# Altium PCB Sensors_and_MCU.PcbDoc
Units mil, origin at the board's own origin, x right, y up, seen from the top; angles counter-clockwise.
Board outline 2913.39 x 2795.28 mil, 2 copper layers (Top Layer, Bottom Layer); 42 components, 33 nets, 173 pads, 21 vias.
Unrouted connection lines stored in the file: 2.
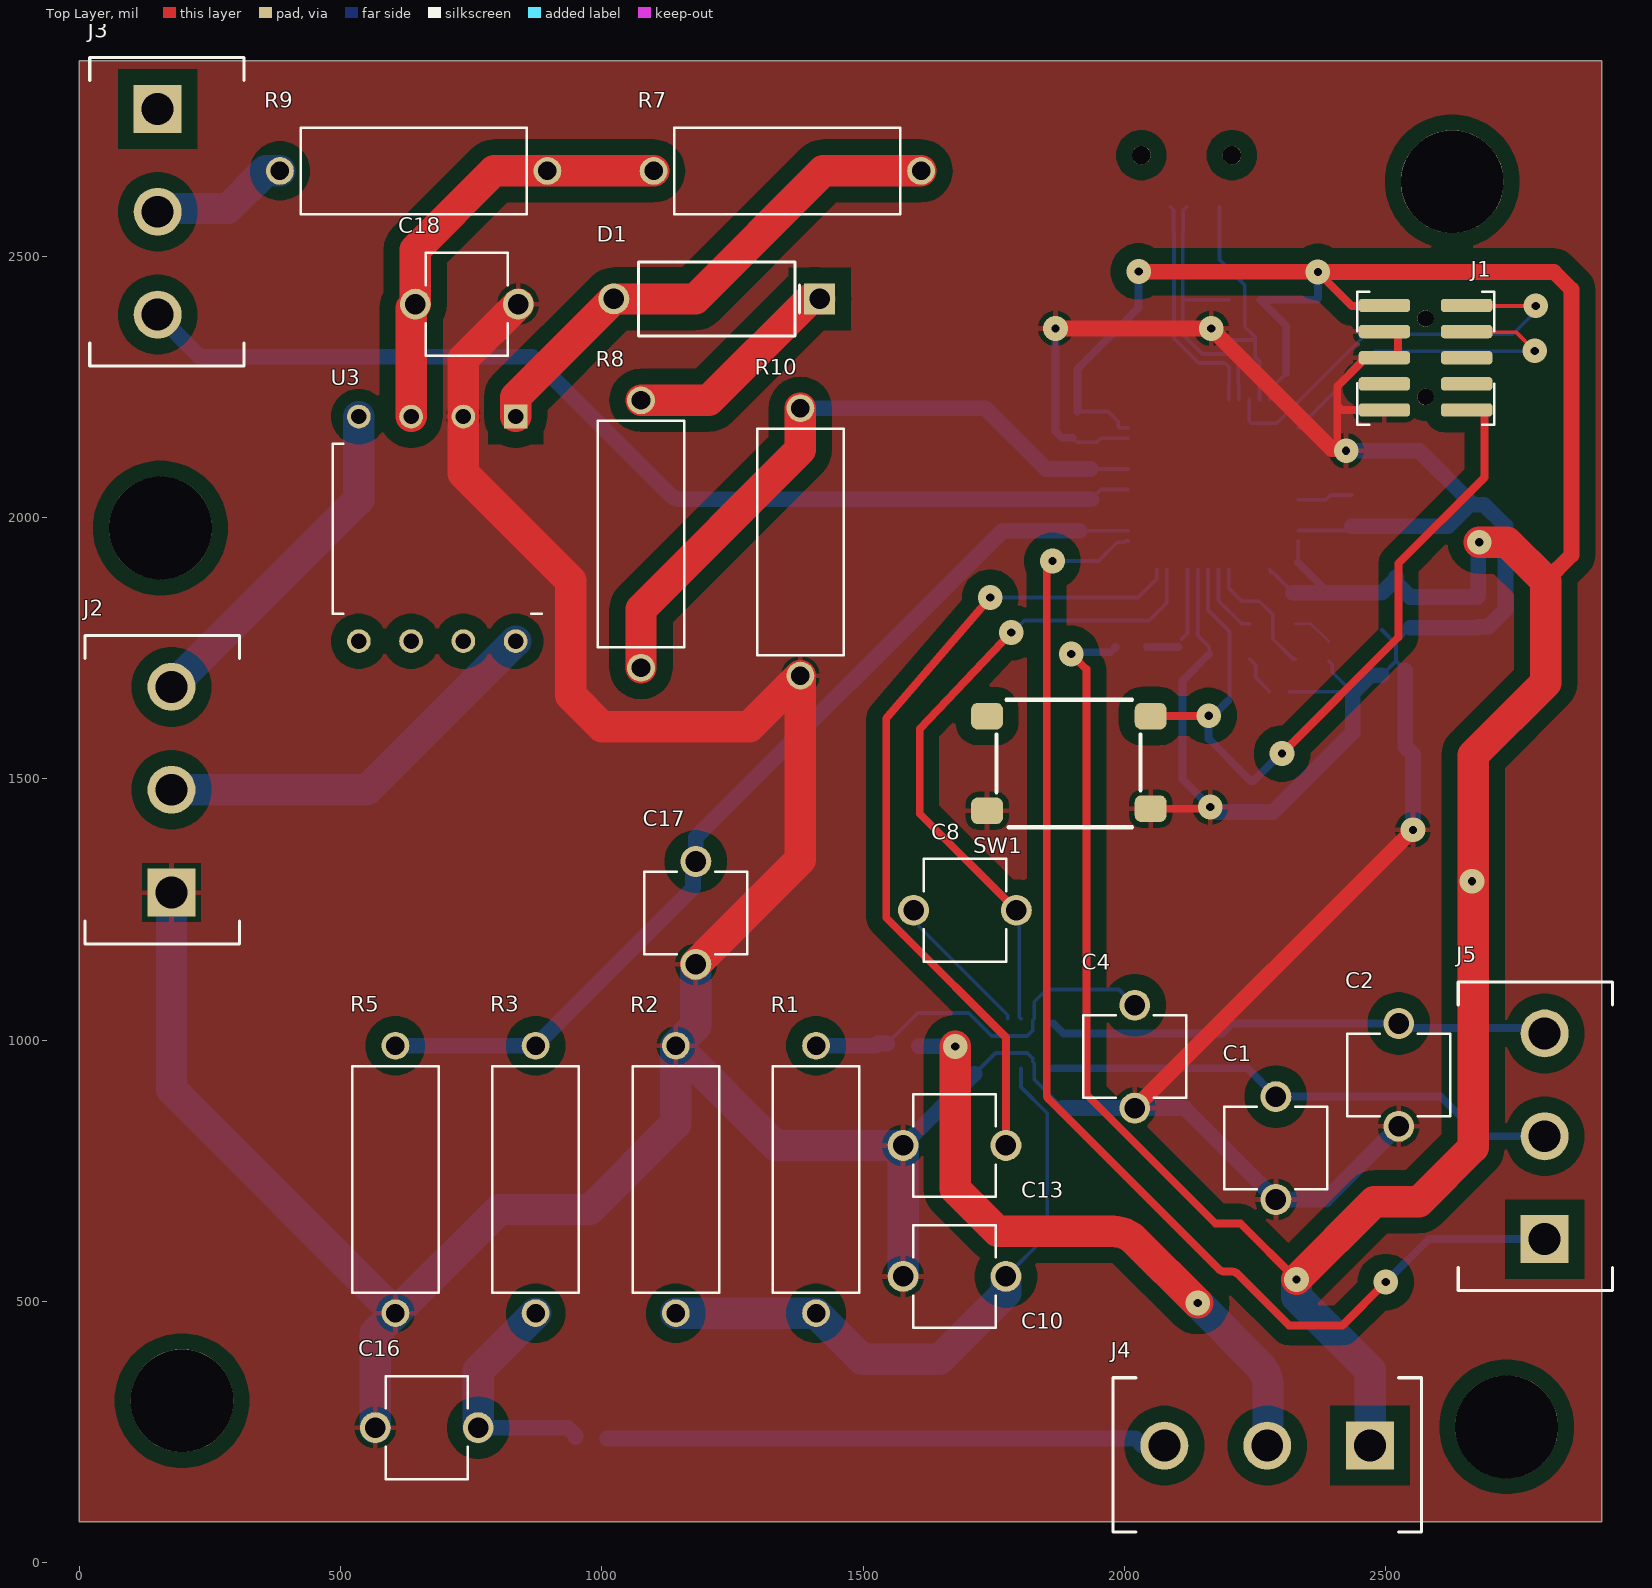
[diagram p0: Top Layer view]
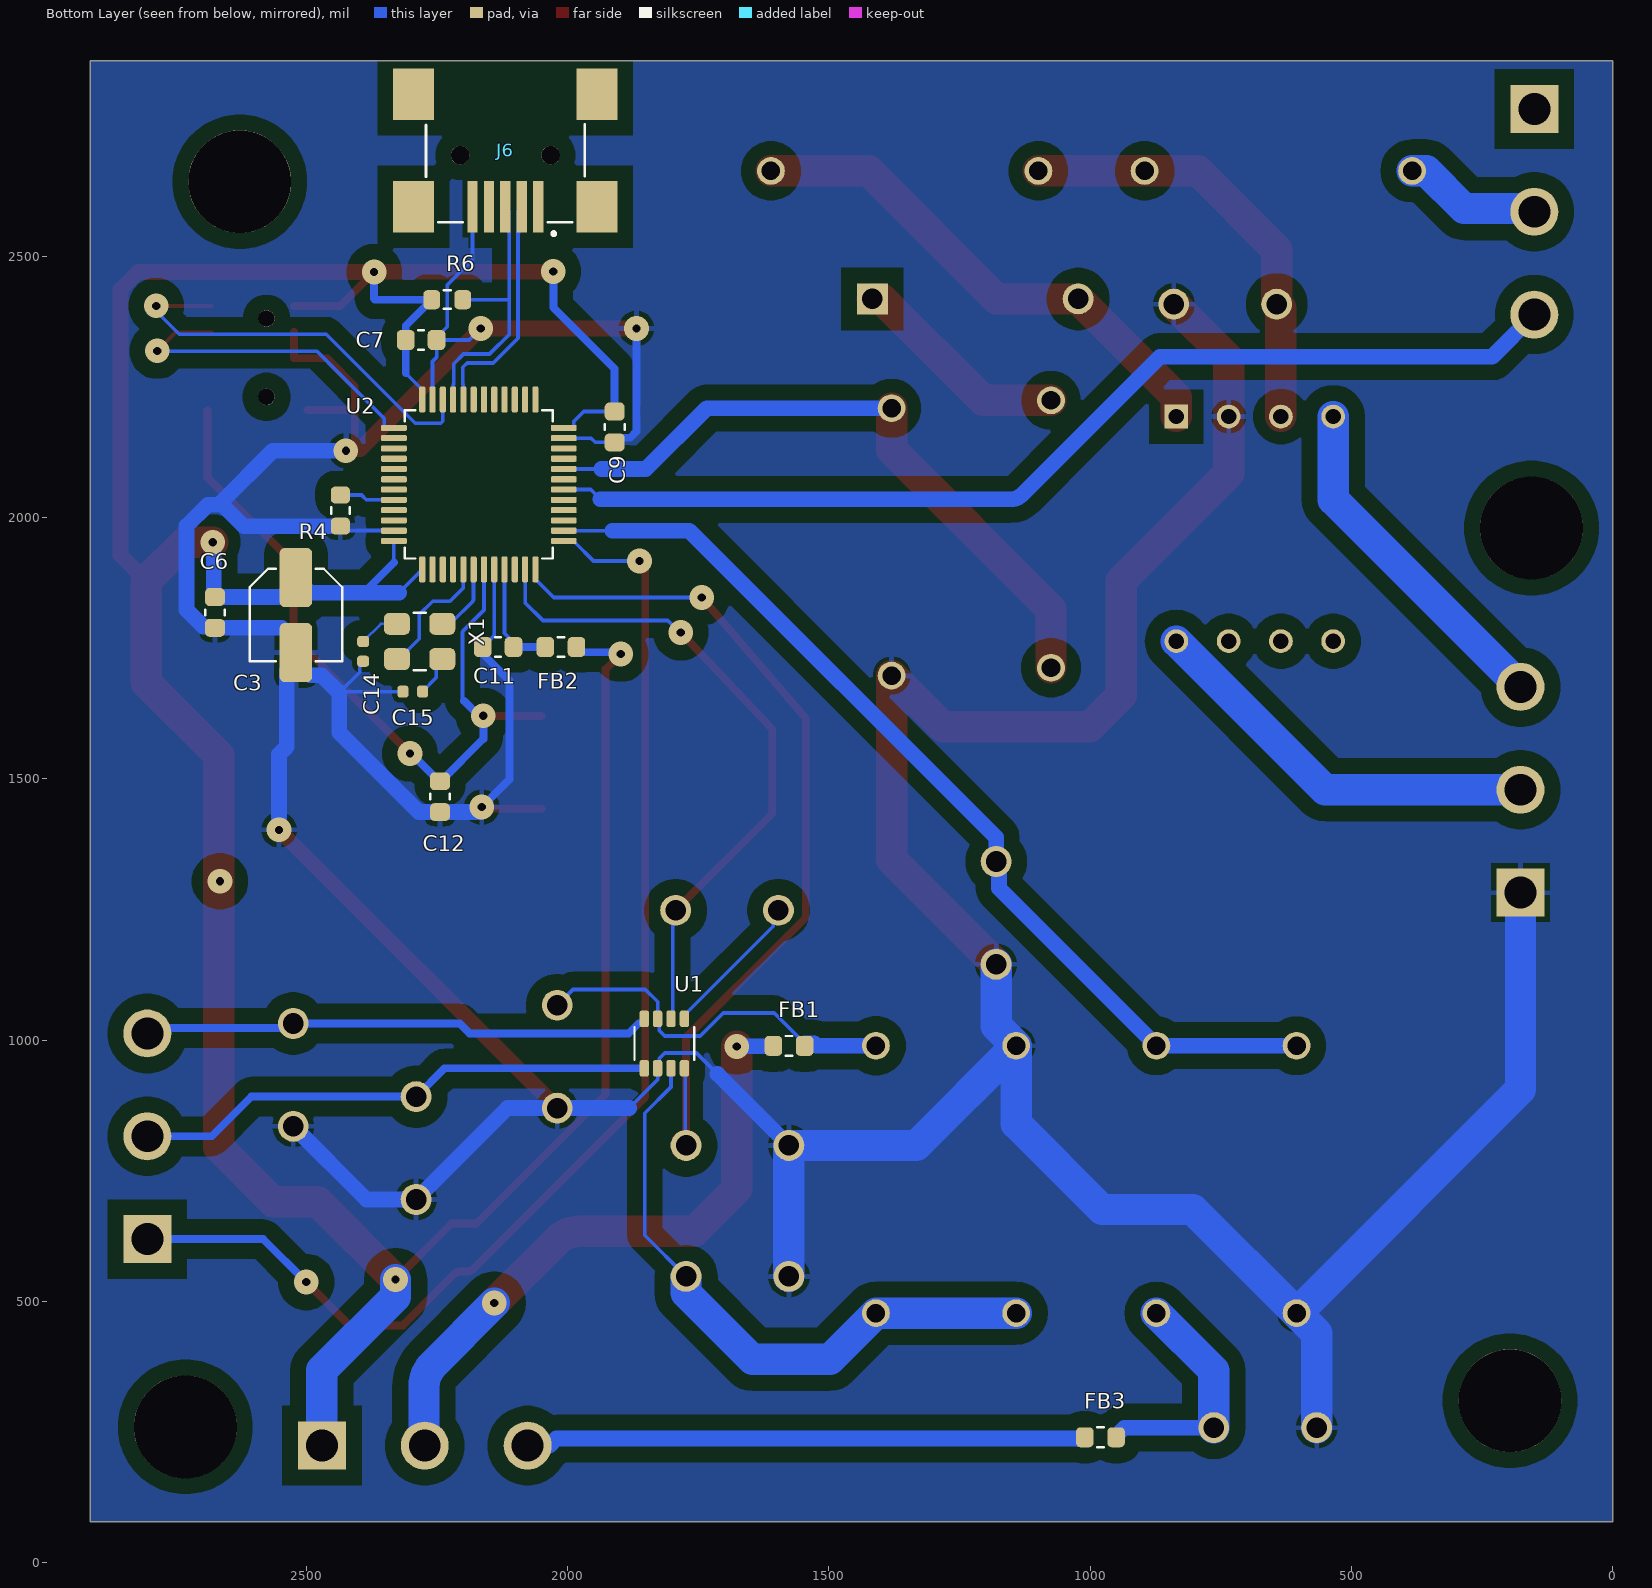
[diagram p1: Bottom Layer view, seen from below]
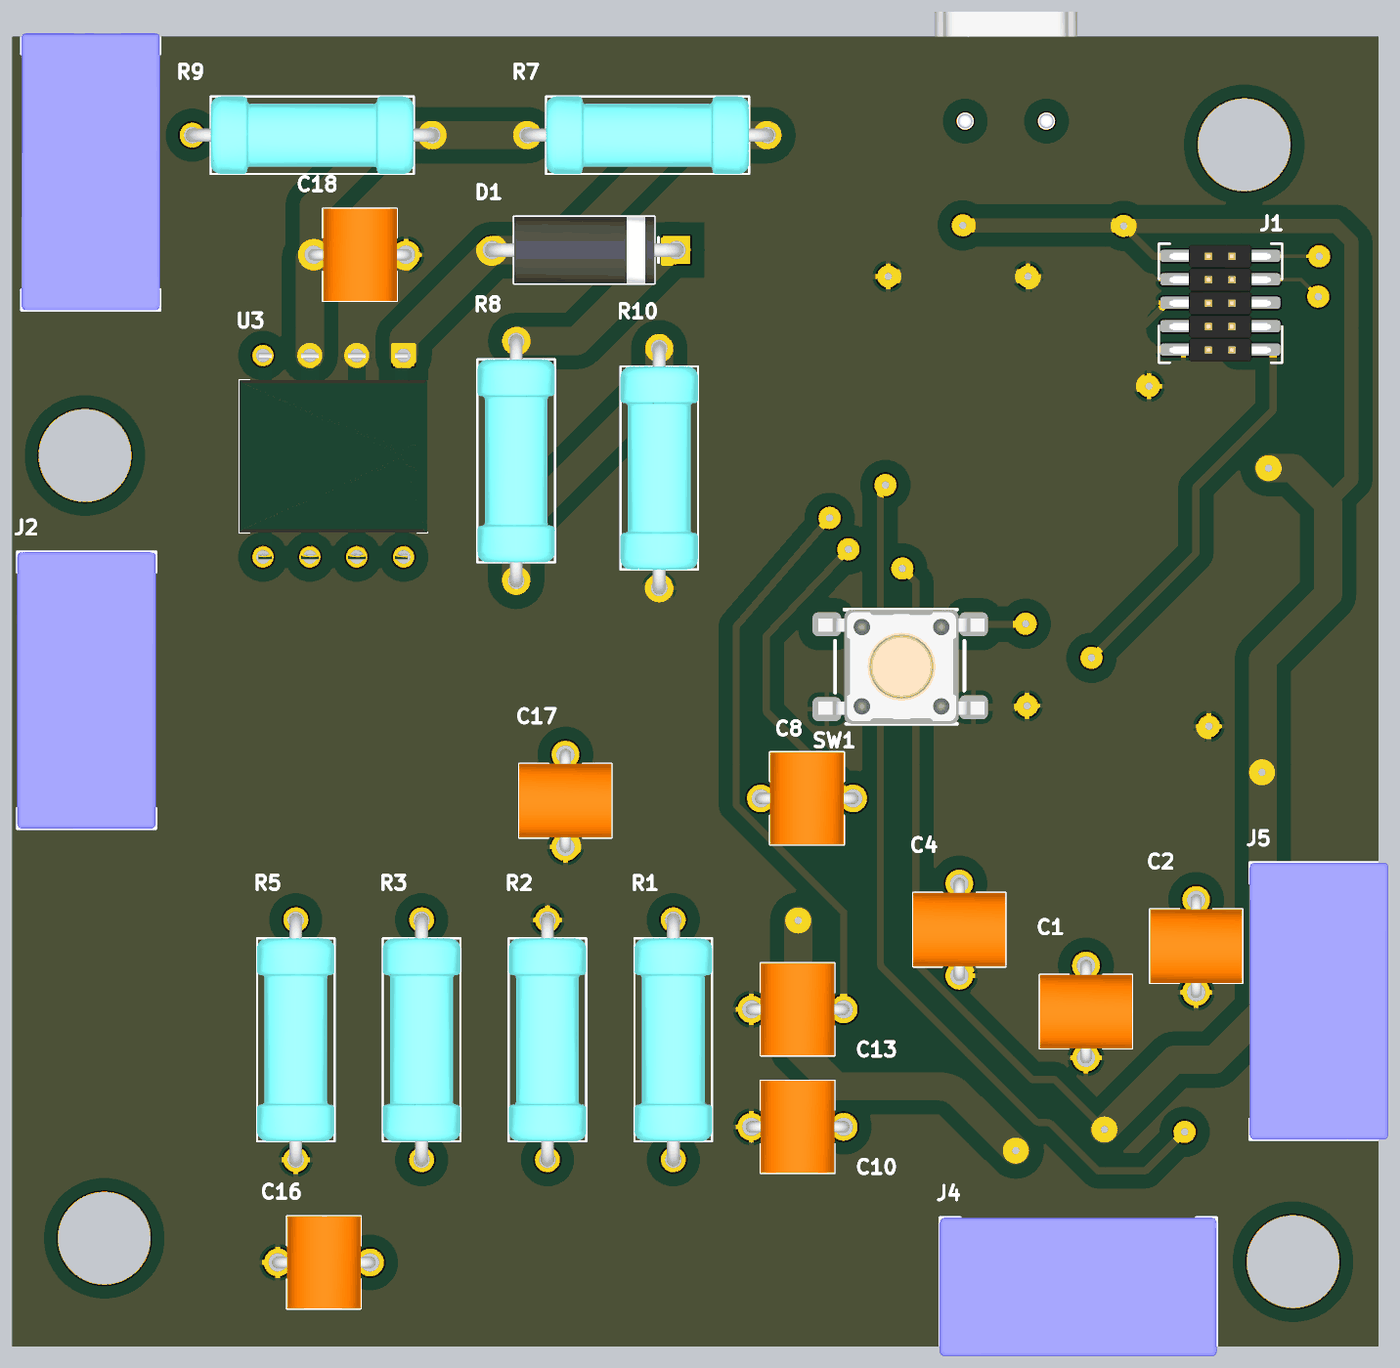
[diagram p2: 3D render of the assembled board from above, using the file's embedded part models]
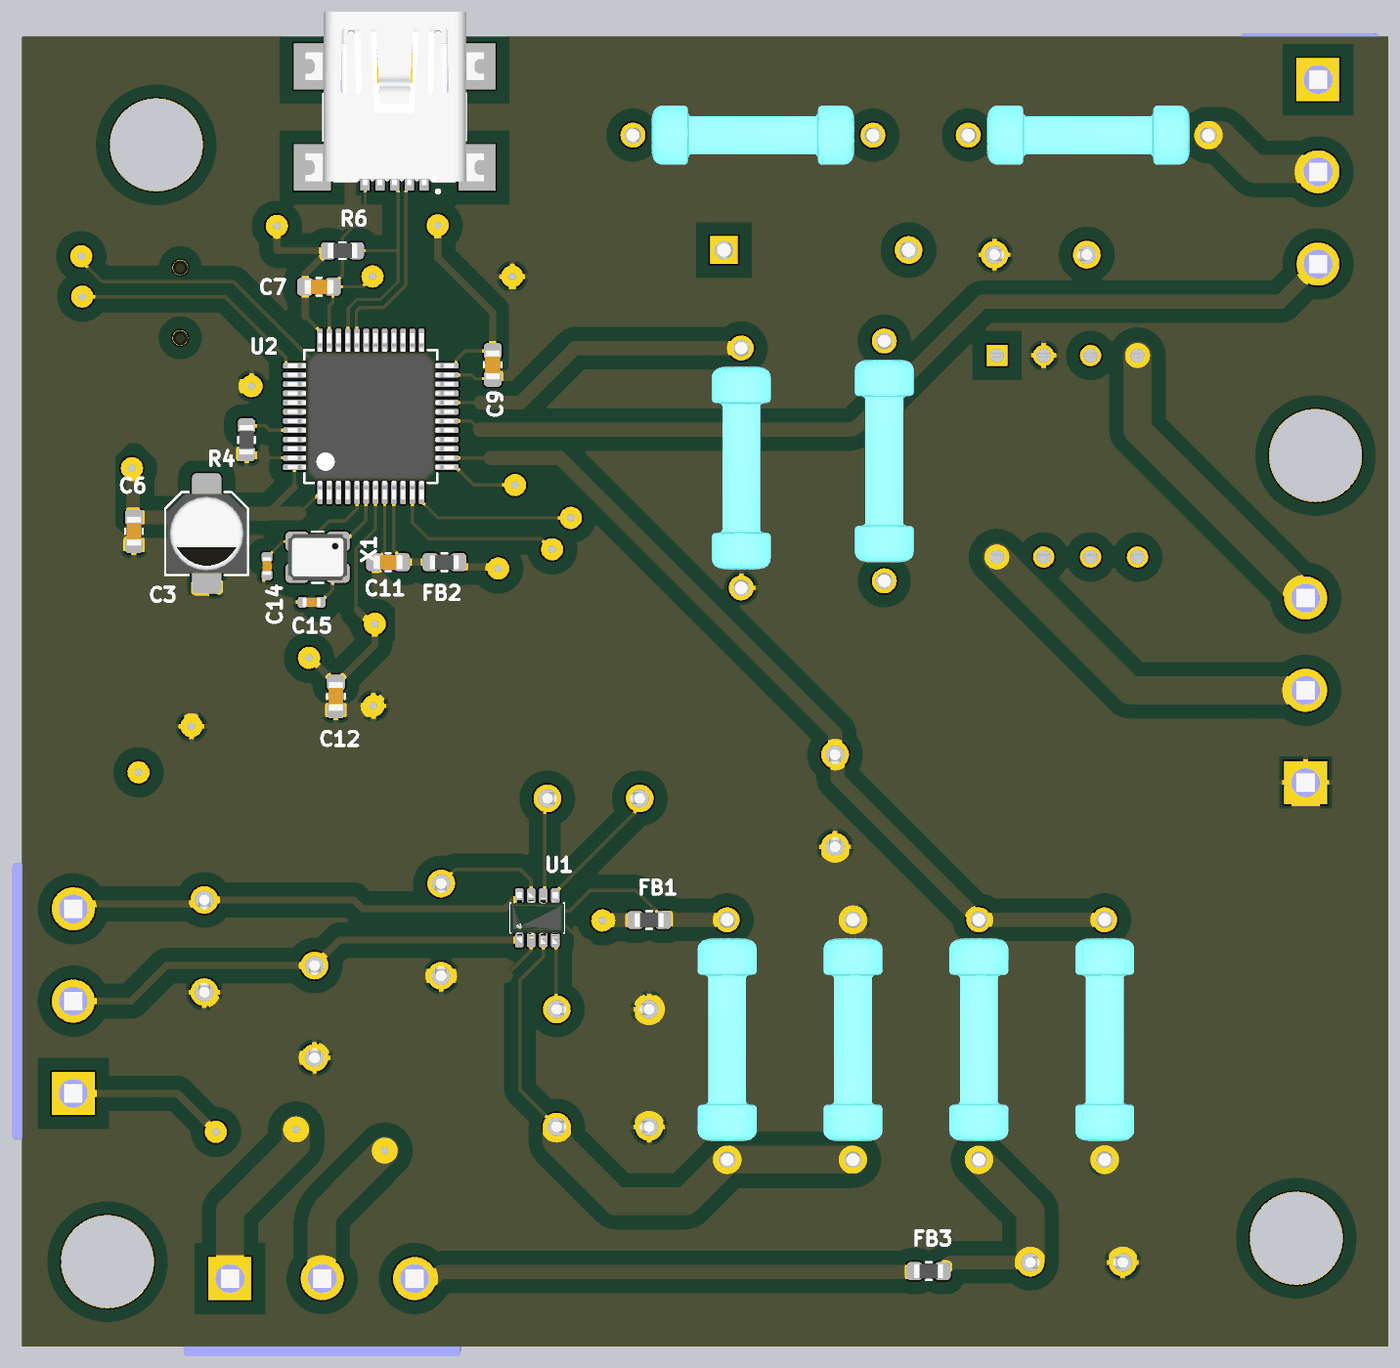
[diagram p3: 3D render of the assembled board from below, using the file's embedded part models]

## Layer stack, top to bottom
Top Solder: solder mask 0.4, Solder Resist, Dk 3.5
Top Layer: signal copper 1.4
Dielectric 1: dielectric 12.6, FR-4, Dk 4.8
Bottom Layer: signal copper 1.4
Bottom Solder: solder mask 0.4, Solder Resist, Dk 3.5

## Board outline
0,78.74 0,2874.02 2913.39,2874.02 2913.39,78.74

## Design rules (kind name [scope] priority, off if disabled: settings)
Clearance [All] p1: gap=30 ignorepadtopadclearanceinfootprint=FALSE except(0: Arc-Hole Track-Hole SMDPad-Hole THPad-Hole Via-Hole Text-Hole; 6: SMDPad-SMDPad; 10: Arc-Arc Arc-Track Arc-SMDPad Arc-THPad Arc-Via Arc-Text Track-Track Track-SMDPad Track-THPad Track-Via Track-Text SMDPad-THPad SMDPad-Via SMDPad-Text THPad-THPad THPad-Via THPad-Text Via-Via Via-Text Text-Text)
DiffPairsRouting [All] p1: maxlimit=10 minlimit=7 mostfreqgap=10 toplayer_minwidth=5 toplayer_maxwidth=15 toplayer_prefwidth=15 bottomlayer_minwidth=5 bottomlayer_maxwidth=15 bottomlayer_prefwidth=15 maxuncoupledlength=500
MinimumSolderMaskSliver [All] p1 off: minsoldermaskwidth=10
PolygonConnect [All] p1: connectstyle=Relief reliefconductorwidth=10 reliefentries=4 polygonreliefangle="90 Angle" airgapwidth=10
RoutingVias [All] p1: holewidth=15.75 width=47.24 viastyle="Through Hole" minholewidth=15.75 minwidth=47.24 maxholewidth=196.85 maxwidth=196.85
SilkToSilkClearance [All] p1 off: silktosilkclearance=10
SilkToSolderMaskClearance [IsPad] p1 off: minsilkscreentomaskgap=10 clearancetoexposedcopper=TRUE
SolderMaskExpansion [All] p1: expansion=4 istentingtop=FALSE
Width [All] p1: maxlimit=80 minlimit=5 preferedwidth=30
26 further rules are at their usual default settings.

## Classes and differential pairs
differential pair USB_Data: +USB_D_P -USB_D_N
differential pair Force: +Force_P -Force_N

## Components (designator, comment, footprint, x,y, rotation, side; value= is the part's Value field where it differs from the comment)
C1 "Capacitor-NP" C-NP 2289.65,793.46 r90 top value=5nF
C2 "Capacitor-NP" C-NP 2524.65,933.46 r90 top value=5nF
C3 "10uF" CAPAE430X610D540L170X65N 2519.65,1813.46 r270 bottom
C4 "Capacitor-NP" C-NP 2019.65,968.46 r90 top value=100nF
C6 "100nF" CAPC160X80X87L35N 2674.65,1818.46 r90 bottom
C7 "100nF" CAPC160X80X87L35N 2280,2340 r0 bottom
C8 "Capacitor-NP" C-NP 1694.65,1248.46 r0 top value=680pF
C9 "100nF" CAPC160X80X87L35N 1909.65,2173.46 r90 bottom
C10 "Capacitor-NP" C-NP 1674.65,547.77 r0 top value=5nF
C11 "100nF" CAPC160X80X87L35N 2132.65,1752.46 r180 bottom
C12 "100nF" CAPC160X80X87L35N 2244,1466 r270 bottom
C13 "Capacitor-NP" C-NP 1674.65,798.46 r0 top value=39nF
C14 "4pF" CAPC100X50X55L22N 2391,1744 r90 bottom
C15 "4pF" CAPC100X50X55L22N 2296,1667 r180 bottom
C16 "Capacitor-NP" C-NP 664.65,258.46 r0 top value=100nF
C17 "Capacitor-NP" C-NP 1179.65,1243.46 r90 top value=100nF
C18 "Capacitor-NP" C-NP 741.22,2408.46 r180 top value=5nF
D1 "Diode" Diode 1219.65,2418.46 r180 top
FB1 "BLM18HE152SH1D" BEADC160X80X95L30N 1576,989 r0 bottom
FB2 "BLM18HE152SH1D" BEADC160X80X95L30N 2012.65,1752.46 r0 bottom
FB3 "BLM18HE152SH1D" BEADC160X80X95L30N 980,240 r180 bottom
J1 "Header_10P" M50-3610542 2576,2306 r270 top
J2 "Molex Micro-Latch" ScrewTerminal 158.46,1479.15 r90 top
J3 "Molex Micro-Latch" ScrewTerminal 167.36,2585.32 r270 top
J4 "Molex Micro-Latch" ScrewTerminal 2273.15,206.28 r180 top
J5 "Molex Micro-Latch" ScrewTerminal 2786.28,816 r90 top
J6 "USB" USB_mini 2053.46,2600.94 r0 bottom
R1 "100k" R-2W 1409.65,733.46 r90 top
R2 "47k" R-2W 1141.31,733.46 r270 top
R3 "200k" R-2W 872.98,733.46 r270 top
R4 "1.5k" RESC160X80X50L30N 2434.65,2013.46 r90 bottom
R5 "100k" R-2W 604.65,733.46 r90 top
R6 "1.5k" RESC160X80X50L30N 2230,2417 r0 bottom
R7 "120k" R-2W 1354.65,2663.46 r180 top
R8 "1M" R-2W 1074.65,1968.46 r90 top
R9 "1k" R-2W 639.65,2663.46 r180 top
R10 "270k" R-2W 1379.65,1953.46 r90 top
SW1 "DTSM-62N-V-T/R" DTSM62 2050,1442.83 r180 top
U1 "AD8293G160ARJZ" SOT23-8P65_280X145L45X30N 1814.65,993.46 r180 bottom
U2 "STM32F103CB" QFP48P50_900X900X160L60X22N 2169.65,2063.46 r180 bottom
U3 "RC4558P" DIP1092W45P254L959H508Q8 684.65,1978.46 r180 top
X1 "16 MHz" OSCCC320X250X60L90X110N 2283,1763 r0 bottom

## Footprints (in the part's own frame and the unit in brackets; to place one, negate y for a bottom-side part, rotate by r counter-clockwise, add the part's x,y. Pads: shape width x height; smd on the part's side, far side on the other; paste and mask are expansions set on the pad)
BEADC160X80X95L30N [mm] "Ferrite Bead, Chip; 1.60 mm L X 0.80 mm W X 0.95 mm H body"
  rrect49% 0.85x0.97 smd: 1(-0.76,0) 2(0.76,0)
  silkscreen extent -0.16,-0.48 0.16,0.48, body extent -1.4,-0.7 1.4,0.7, height 1.04
C-NP [mm] "Capacitor, Radial (Disk), 5.00 mm Pitch X 0.80 mm W X 4.00 mm L X 5.00 mm T X 6.00 mm H body"
  round 1.5 hole 1 paste-1.5: 1(-2.5,0) 2(2.5,0)
  silkscreen extent -2,-2.5 2,2.5, body extent -2.8,-2.5 2.8,2.5, height 6
CAPAE430X610D540L170X65N [mm] "Capacitor, Aluminum Electrolytic; 4.30 mm L X 4.30 mm W X 6.10 mm H body"
  rrect32% 2.88x1.58 smd: 1(-1.825,0) 2(1.825,0)
  silkscreen extent -2.25,-2.25 2.25,2.25, body extent -3.47,-2.45 3.47,2.45, height 6.1
CAPC100X50X55L22N [mm] "Capacitor, Chip; 1.00 mm L X 0.50 mm W X 0.55 mm H body"
  rrect52% 0.54x0.58 smd: 1(-0.48,0) 2(0.48,0)
  body extent -0.9,-0.44 0.9,0.44, height 1.04
CAPC160X80X87L35N [mm] "Capacitor, Chip; 1.60 mm L X 0.80 mm W X 0.87 mm H body"
  rrect51% 0.87x0.97 smd: 1(-0.75,0) 2(0.75,0)
  silkscreen extent -0.14,-0.48 0.14,0.48, body extent -1.39,-0.69 1.39,0.69, height 0.87
Diode [mm] "Diode, Axial; 10.00 mm Pitch X 0.75 mm W 7.60 mm L X 5.00 mm Dia. body"
  round 1.5 hole 1 paste-1.5: A(5,0)
  rect 1.5x1.5 / inner round 1.5 / far side rect 1.5x1.5 hole 1 paste-1.5: C(-5,0)
  silkscreen extent -4.03,-1.8 3.8,1.8, body extent -5.38,-1.81 5.38,1.81, height 5.01
DIP1092W45P254L959H508Q8 [mm] "DIP, 10.92 mm lead span, 2.54 mm pitch; 8 pin, 9.59 mm L X 7.94 mm W X 5.08 mm H body"
  rect 1.15x1.15 / inner round 1.15 / far side rect 1.15x1.15 hole 0.75 paste-1.15: 1(-3.81,-5.46)
  round 1.15 hole 0.75 paste-1.15: 2(-1.27,-5.46) 3(1.27,-5.46) 4(3.81,-5.46) 5(3.81,5.46) 6(1.27,5.46) 7(-1.27,5.46) 8(-3.81,5.46)
  silkscreen extent -5.08,-4.13 5.08,4.13, body extent -5.08,-5.59 5.08,5.59, height 5.08
DTSM62 [mm]
  rrect50% 1.55x1.3 smd mask+0: 1(0,0) 1(7.95,0.1) 2(0,-4.5) 2(7.95,-4.5)
  silkscreen extent 0.5,-5.3 7.5,0.9, body extent -0.8,-5.5 8.8,1.1, height 5.11
M50-3610542 [mm]
  rrect50% 0.65x2.5 smd: 1(-2.54,-2) 2(-1.27,-2) 3(0,-2) 4(1.27,-2) 5(2.54,-2) 6(-2.54,2) 7(-1.27,2) 8(0,2) 9(1.27,2) 10(2.54,2)
  round 0.8 hole 0.8: ""(-1.905,0) ""(1.905,0)
  silkscreen extent -3.2,-3.32 3.25,3.35, body extent -3.18,-3.33 3.25,3.38, height 4.69
OSCCC320X250X60L90X110N [mm] "Oscillator, Corner Concave; 3.20 mm L X 2.50 mm W X 0.60 mm H body"
  rrect47% 1.26x1.06 smd: 1(-1.105,-0.855) 2(1.105,-0.855) 3(1.105,0.855) 4(-1.105,0.855)
  silkscreen extent -0.3,-1.39 0.3,1.39, body extent -1.94,-1.59 1.94,1.59, height 1.04
QFP48P50_900X900X160L60X22N [mm] "Quad Flat Pack (QFP), 0.50 mm pitch;  square, 12 pin X 12 pin, 7.00 mm L X 7.00 mm W X 1.60 mm H body"
  rrect50% 0.3x1.259 smd: 1(-2.75,-4.128) 2(-2.25,-4.128) 3(-1.75,-4.128) 4(-1.25,-4.128) 5(-0.75,-4.128) 6(-0.25,-4.128) 7(0.25,-4.128) 8(0.75,-4.128) 9(1.25,-4.128) 10(1.75,-4.128) 11(2.25,-4.128) 12(2.75,-4.128) 25(2.75,4.128) 26(2.25,4.128) 27(1.75,4.128) 28(1.25,4.128) 29(0.75,4.128) 30(0.25,4.128) 31(-0.25,4.128) 32(-0.75,4.128) 33(-1.25,4.128) 34(-1.75,4.128) 35(-2.25,4.128) 36(-2.75,4.128)
  rrect50% 1.259x0.3 smd: 13(4.128,-2.75) 14(4.128,-2.25) 15(4.128,-1.75) 16(4.128,-1.25) 17(4.128,-0.75) 18(4.128,-0.25) 19(4.128,0.25) 20(4.128,0.75) 21(4.128,1.25) 22(4.128,1.75) 23(4.128,2.25) 24(4.128,2.75) 37(-4.128,2.75) 38(-4.128,2.25) 39(-4.128,1.75) 40(-4.128,1.25) 41(-4.128,0.75) 42(-4.128,0.25) 43(-4.128,-0.25) 44(-4.128,-0.75) 45(-4.128,-1.25) 46(-4.128,-1.75) 47(-4.128,-2.25) 48(-4.128,-2.75)
  silkscreen extent -3.6,-3.6 3.6,3.6, body extent -4.5,-4.5 4.5,4.5, height 1.6
R-2W [mm] "Resistor, Axial; 13.00 mm Pitch X 0.70 mm W 11.00 mm L X 3.00 mm Dia. body"
  round 1.35 hole 0.9 paste-1.35: 1(-6.5,0) 2(6.5,0)
  silkscreen extent -5.5,-2.1 5.5,2.1, body extent -6.85,-2.1 6.85,2.1, height 3
RESC160X80X50L30N [mm] "Resistor, Chip; 1.60 mm L X 0.80 mm W X 0.50 mm H body"
  rrect51% 0.82x0.93 smd: 1(-0.755,0) 2(0.755,0)
  silkscreen extent -0.17,-0.45 0.17,0.45, body extent -1.37,-0.67 1.37,0.67, height 1
ScrewTerminal [mm] "SIP, 5.00 mm pitch; 3 pin, 15.00 mm L X 7.50 mm W X 10.00 mm H body"
  rect 2.33x2.33 / inner round 2.33 / far side rect 2.33x2.33 hole 1.55 paste-2.33: 1(-5,-0.45)
  round 2.33 hole 1.55 paste-2.33: 2(0,-0.45) 3(5,-0.45)
  silkscreen extent -7.5,-3.75 7.5,3.75, body extent -7.5,-3.75 7.5,3.75, height 10
SOT23-8P65_280X145L45X30N [mm] "Small Outline Transistor, SOT-23 Type, 0.65 mm pitch; 8 pin, 2.90 mm L X 1.60 mm W X 1.45 mm H body"
  rrect50% 0.455x0.806 smd: 1(-0.975,-1.203) 2(-0.325,-1.203) 3(0.325,-1.203) 4(0.975,-1.203) 5(0.975,1.203) 6(0.325,1.203) 7(-0.325,1.203) 8(-0.975,1.203)
  silkscreen extent -1.45,-0.8 1.45,0.8, body extent -1.45,-1.4 1.45,1.4, height 1.45
USB_mini [mm]
  rect 0.5x2.5 smd: 1(0.06,0.16) 2(0.86,0.16) 3(1.66,0.16) 4(2.46,0.16) 5(3.26,0.16)
  rect 2x2.5 smd: 6(-2.8,-5.32) 6(-2.8,0.16) 6(6.12,-5.32) 6(6.12,0.16)
  round 0.9 hole 0.9: 9(-0.54,-2.35) 9(3.86,-2.35)
  silkscreen extent -2.2,-3.86 5.52,1.5, body extent -4,-8.43 7.3,1.58, height 3.9

## Part data
C3: library part C_10uF_50V, Capacitor Case Style=B, Manufacturer Part Number=EEE-FK1H100SR, Supplier Part Number=667-EEE-FK1H100SR, Voltage Rating=50V, ComponentLinkDescription=Datasheet, ComponentLinkURL=https://hr.mouser.com/datasheet/2/315/ABA0000C1251-1138508.pdf, FR_SN=C_P-01, Part Number=C_10uF_50V
C6 C7 C9 C11 C12: library part C_0603_100nF_50V, Capacitor Case Style=0603, Manufacturer Part Number=CC0603MRY5V9BB104, Supplier Part Number=603-C0603MRY5V9BB104, Voltage Rating=50V, ComponentLinkDescription=Datasheet, ComponentLinkURL=https://hr.mouser.com/datasheet/2/212/KEM_C1027_X7, FR_SN=C_NP-02, Part Number=C_0603_100nF_50V
C14 C15: library part C_0402_4pF_25V, Capacitor Case Style=0402, Manufacturer Part Number=GRM0225C1E4R0CA03L, Supplier Part Number=81-GRM0225C1E4R0CA3L, Voltage Rating=25V, ComponentLinkDescription=Datasheet, ComponentLinkURL=https://hr.mouser.com/datasheet/2/281/GRM0225C1E4R, FR_SN=C_NP-69, Part Number=C_0402_4pF_25V
FB1 FB2 FB3: DC Current Rating="500 mA", Inductor Case Style=0603, Supplier Part Number=81-BLM18HE152SH1D, ComponentLinkDescription=Datasheet, ComponentLinkURL=https://hr.mouser.com/datasheet/2/281/QNFA9104-1915632.pdf, FR_SN=FB-04, Manufacturer Part Number=BLM18HE152SH1D, Part Number=BLM18HE152SH1D
J1: library part Header_2x5, Manufacturer Part Number=M50-3610542, Supplier Part Number=855-M50-3610542, ComponentLinkDescription=Datasheet, ComponentLinkURL=https://hr.mouser.com/datasheet/2/181/M50-361-888037.pdf, FR_SN=J-18, Part Number=Header_2x5
J2 J3 J4 J5: library part "Molex Micro-Latch 1x3", Manufacturer Part Number=53254-0370, Supplier Part Number=538-53254-0370, ComponentLinkDescription=Datasheet, ComponentLinkURL=https://hr.mouser.com/datasheet/2/276/0532540370_PCB_HEADERS-171041.pdf, FR_SN=J-13, Part Number="Molex Micro-Latch 1x3"
J6: library part "USB mini", Manufacturer Part Number=UJ2-MBH-1-SMT-TR, Supplier Part Number=490-UJ2-MBH-1-SMT, ComponentLinkDescription=Datasheet, ComponentLinkURL=https://hr.mouser.com/datasheet/2/670/uj2-mbh-smt-1313286.pdf, FR_SN=J-03, Part Number="USB mini"
R1 R2 R3 R5 R7 R8 R9 R10: library part Resistor
R4 R6: library part R_0603_1k5_0W1, Manufacturer Part Number=RT0603FRE101K5L, Power Rating=100mW, Resistor Case Style=0603, Supplier Part Number=603-RT0603FRE101K5L, Temperature Coefficient="50 PPM / C", ComponentLink1Description=Datasheet, ComponentLink1URL=https://hr.mouser.com/datasheet/2/447/PYu_RT_1_to_0_01_RoHS_L_12-3003070.pdf, FR_SN=R-118, Part Number=R_0603_1k5_0W1
SW1: Supplier Part Number=113-DTSM-62N-V-T/R, Switch Case Style=SMD, ComponentLinkDescription=Datasheet, ComponentLinkURL=https://www.mouser.com/datasheet/2/910/464_DTSMJ_6-1571536.pdf, Configuration=SPST, FR_SN=SW-12, Manufacturer Part Number=DTSM-62N-V-T/R, Part Number=DTSM-62N-V-T/R, Type="Tactile Switch"
U1: IC Case Style=SOT-23-8, Manufacturer Part Number=AD8293G160ARJZ-R7, Supplier Part Number=584-AD8293G160ARJZR7, Category="Instrumentation Amplifier", ComponentLinkDescription=Datasheet, ComponentLinkURL=https://hr.mouser.com/datasheet/2/609/AD8293G80_160-877846.pdf, FR_SN=U_Analog-17, Part Number=AD8293G160ARJZ
U2: IC Case Style=LQFP-48, Manufacturer Part Number=STM32F103CBT6, Supplier Part Number=511-STM32F103CBT6, Category="ARM Microcontrollers", ComponentLinkDescription=Datasheet, ComponentLinkURL=https://hr.mouser.com/datasheet/2/389/stm32f103c8-1851025.pdf, FR_SN=MCU-11, Part Number=STM32F103CB
U3: IC Case Style=DIP-8, Supplier Part Number=595-RC4558P, Category="Dual Chanel OP Amp", ComponentLinkDescription=Datasheet, ComponentLinkURL=https://www.ti.com/lit/ds/symlink/rc4558.pdf?HQS=dis-mous-null-mousermode-dsf-pf-null-wwe&ts=1651672561225&ref_url=https%253A%252F%252Fwww.mouser.pl%252F, FR_SN=U_Analog-16, Manufacturer Part Number=RC4558P, Part Number=RC4558P
X1: library part X_16MHZ_9pF, Frequency=16MHz, Frequency Tolerance="10 PPM", Manufacturer Part Number="TSX-3225 16.0000MF09Z-AC3", Supplier Part Number=732-TX325-16F09Z-AC3, ComponentLinkDescription=Datasheet, ComponentLinkURL=https://hr.mouser.com/datasheet/2/137/A-238_en-932914.pdf, FR_SN=X-09, Part Number=X_16MHZ_9pF

## Free pads (board coordinates)
  round 196.85 hole 196.85: 1(155,1980) 2(196.18,310) 3(2731.18,260) 4(2627.09,2642.8)

## Via types
v1: diameter 47.24, hole 15.75, Top Layer to Bottom Layer, 21 vias

## Nets (pads, with @x,y where several pads share a name; then routed paths per layer and width w, separated by ;. In a path a pad name is that pad's centre, name@x,y a point inside that pad or via, vN(x,y) a via of type N, cw(c..) or ccw(c..) an arc to the next point about the centre after c; other vN are vias at no path point)
3V3: C3.1 C6.2 C7.2 C9.2 FB2.1 J1.1 J4.1 R6.2 U2.1 U2.24 U2.36 U2.48 | length 6715.1
  Top Layer w7: v1(2027,2471) v1@2027.5,2470.5 ; v1@2369.5,2470.5 v1(2370,2470)
  Top Layer w15: v1(1898,1739) 1927,1710 1927,896.18 2174.3,648.88 2222.12,648.88 v1(2329,542) ; v1(2370,2470) 2435,2405 J1.1@2523.26,2405 ; v1(2665,1304) v1@2667,1302
  Top Layer w30: v1@2027.5,2470.5 v1@2369.5,2470.5 ; v1(2370,2470) 2822,2470 2855.46,2436.54 2855.46,1928.46 2806,1879
  Top Layer w60: v1(2329,542) 2478,691 2563.48,691 2667,794.52 2667,1302 2667,1545 2806,1684 2806,1879 2732,1953 v1(2679,1953)
  Bottom Layer w7: C9.2@1909.82,2203.17 C9.2 1968.91,2202.99 1987.86,2184.04 1987.86,2174.14 1990.27,2171.73 U2.24 ; U2.1 2280.32,1895.64 cw(c2280.32,1888.64) 2285.23,1893.63 ; U2.36 2277.91,2244.86 2309.53,2276.48 ; 2285.24,1893.62 2322.49,1856.36 ; 2332.17,1913.83 U2.48
  Bottom Layer w15: v1(1898,1739) 1901.16,1742.16 1973.55,1742.16 1982.72,1751.34 FB2.1 ; C9.2@1909.82,2203.17 1909.82,2284.82 2027,2402 v1(2027,2471) ; 2309.53,2276.48 C7.2 2309.53,2367.2 R6.2 2368,2417 2370,2419 v1(2370,2470) ; 2332.17,1913.83 2389.64,1856.36 2390,1856
  Bottom Layer w30: 2322.49,1856.36 2389.64,1856.36 ; 2390,1856 2492.53,1856 C3.1@2519.65,1883.11 ; C3.1 C3.1@2519.65,1883.11 ; v1(2679,1953) 2676.82,1950.82 2676.82,1850.17 C6.2 2546.76,1847.99 2519.65,1875.1 C3.1@2519.65,1883.11
  Bottom Layer w60: v1(2329,542) 2329,509 2470,368 J4.1
5V: FB1.2 J4.2 | length 1220.9
  Top Layer w60: v1(1676,988) 1676,715 1757,634 1977.27,634 cw(c1977.27,574) 2019.55,616.58 v1(2140,497)
  Bottom Layer w30: FB1.2 1606.64,988.29 1675.71,988.29 v1(1676,988)
  Bottom Layer w60: v1(2140,497) 2257.23,378.9 cw(c2214.65,336.63) 2274.65,336.63 J4.2@2274.65,224
9V: FB3.1 J4.3 | length 1072
  Bottom Layer w30: FB3.1@1009.92,237.64 2021.34,237.64 2034.98,224 J4.3
+12V: J2.2 U3.8 | length 776.2
  Bottom Layer w60: J2.2 550.29,1479.15 U3.8
-12V: J2.3 U3.4 | length 665.9
  Bottom Layer w60: J2.3 534.65,2034.46 U3.4
BOOT0: R4.2 U2.44 | length 106.3
  Bottom Layer w7: U2.44 2384.94,2033.94 2394.19,2043.19 R4.2
CurrentSense: J5.1 U2.13 | length 2399.4
  Top Layer w15: v1(1862,1917) 1855.39,1910.39 ccw(c1866,1899.79) 1851,1899.79 1851,897.21 ccw(c1866,897.21) 1855.36,886.64 1855.39,886.61 2180.61,561.39 2180.64,561.36 ccw(c2191.21,572) 2191.21,557 2205.79,557 cw(c2205.79,542) 2216.39,552.61 2315,454 2417,454 v1(2500,537) ; J5.1@2798.32,613.46 J5.1
  Bottom Layer w7: v1(1862,1917) 1950.05,1917 1985.84,1952.79 1999,1952.79 2001.41,1955.2 U2.13
  Bottom Layer w15: v1(2500,537) 2582.15,619.15 J5.1
Force_N: C1.2 J5.2 U1.1 | length 994.9
  Bottom Layer w15: 1863,946.1 2235.43,946.1 C1.2 2605.11,891.89 2681,816 J5.2
Force_OUT: C8.2 U1.6 U2.11 | length 1274.8
  Top Layer w15: v1(1783,1780) 1608,1595.47 1608,1433.54 C8.2
  Bottom Layer w7: v1(1783,1780) 1785.26,1780 1808.26,1803 2047,1803 2081.06,1837.06 U2.11 ; C8.2 1798.72,1242.82 1798.72,1043.96 U1.6
Force_P: C2.2 J5.3 U1.8 | length 964.2
  Bottom Layer w15: 1863.54,1032.46 1883,1013 2187.35,1013 2206.24,1031.89 C2.2 2533.08,1023.46 2793.39,1023.46 J5.3
ForceADC_OUT: C13.2 U1.4 U2.12 | length 1717.9
  Top Layer w15: v1(1743,1847) 1547.63,1619.78 1544,1615.56 1544,1610 1544,1234.18 1576.74,1201.44 1773.07,1005.11 C13.2
  Bottom Layer w7: v1(1743,1847) 2026.31,1847 2061.38,1882.07 U2.12 ; C13.2 1774.67,800.06 1774.67,944.51 U1.4
ForceSense: C17.2 R3.1 R5.2 U2.14 | length 1864.4
  Bottom Layer w7: 1914.12,1974.88 U2.14
  Bottom Layer w30: R5.2 R3.1 1174.09,1290.48 1174.09,1336.33 C17.2 1179.65,1387.65 1766.88,1974.88 1914.12,1974.88
GateControl: J3.3 U2.18 | length 2010.3
  Bottom Layer w7: 1937,2035 1955.62,2053.62 U2.18
  Bottom Layer w30: J3.3 230.11,2308 866,2308 1013.95,2160.05 1130.26,2043.74 ccw(c1151.43,2065) 1151.43,2035 1937,2035
GND: C1.1 C2.1 C3.2 C4.1 C6.1 C7.1 C9.1 C10.1 C11.1 C12.2 C13.1 C14.1 C15.1 C16.1 C17.1 C18.1 J1.2 J1.3 J1.5 J2.1 J6.5 R2.1 R4.1 R5.1 R10.1 SW1.1 U1.2 U2.8 U2.23 U2.35 U2.47 U3.2 | length 11729.7
  Top Layer w15: SW1.1@2050,1442.83 2160.83,1442.83 v1(2164,1446) ; 2407,2145 2407,2214.79 ; J1.5 2424,2206 2415.79,2206 2407,2214.79 ; J1.2@2523.26,2355 2523.26,2305 2459.84,2305 2455.55,2300.7 2455.55,2299.55 2407,2251 2407,2214.79
  Top Layer w30: v1(1868,2362) v1(2166,2362) 2396.7,2131.3 2420.7,2131.3 v1(2424,2128) ; C4.1 v1(2552,1402.39)
  Top Layer w60: C18.1 734.65,2303.46 U3.2 734.65,2084.65 940,1879.29 940,1660 1000,1600 1282.09,1600 R10.1 1379.65,1345.04 C17.1
  Bottom Layer w7: 1712.81,935.06 1753.22,975.47 1813.78,975.47 1824.31,964.94 1824.31,958.39 1827.44,955.26 U1.2 1827.44,924.56 1881.96,870.04 ; C9.1@1900.63,2152.95 C9.1 1946.94,2143.94 1955.05,2152.05 U2.23 ; U2.8 2140.12,1774.52 C11.1 C11.1@2162.17,1739.17 ; v1(2166,2362) 2188,2340 C7.1 ; J6.5 2181.81,2493.19 2230,2445 2230,2365.27 2250.47,2344.8 C7.1 ; U2.35 2258.23,2298.77 2250.47,2306.53 C7.1 ; C15.1 2434.68,1667 ; U2.47 2332.45,1975.16 2426.07,1975.16 R4.1 ; C14.1@2391.79,1725.1 C14.1 2397.67,1718.44 2397.67,1704.02 2434.68,1667 ; 2434.9,1604 2436.9,1606 ; 2436.9,1664.79 2434.68,1667 ; C3.2@2492.53,1698.37 C3.2@2519.65,1725.49 ; C3.2@2492.53,1784.85 C3.2@2519.65,1757.74 ; C3.2@2537.3,1707.84 C3.2@2519.65,1725.49 ; C3.2@2546.76,1788.94 2519.65,1761.83 C3.2@2519.65,1757.74 ; C3.2@2519.65,1725.49 C3.2 C3.2@2519.65,1757.74
  Bottom Layer w15: v1(1868,2362) 1868,2165 1880.05,2152.95 C9.1@1900.63,2152.95 ; C11.1@2162.17,1739.17 2111,1688 2111,1499 v1(2164,1446)
  Bottom Layer w30: C13.1 1712.81,935.06 ; 1881.96,870.04 C4.1 2114.65,870.04 C1.1 2384.65,695.04 C2.1 ; v1@2167.43,1436.47 C12.2 2284.47,1436.47 2436.9,1588.9 2436.9,1606 2436.9,1664 ; v1(2424,2128) 2564.15,2128 2664.07,2028.07 2619.74,1983.74 R4.1 ; 2436.9,1664.79 2470.48,1698.37 C3.2@2492.53,1698.37 ; C3.2@2537.3,1707.84 2537.3,1561.65 2552,1546.94 v1(2552,1402.39) ; C3.2@2546.76,1788.94 C6.1 2676.77,1791.06 2696.57,1791.06 2729,1823.49 2729,1983.92 2688.57,2024.35 2660.35,2024.35
  Bottom Layer w60: J2.1 176.18,906.02 R5.1 ; C16.1 566.22,439.13 R5.1 ; C17.1 1179.65,1027.7 R2.1 ; C10.1 C13.1 1332.22,798.46 R2.1 ; R5.1 803.09,676 977,676 1141.31,840.31 R2.1
NetC4_2: C4.2 FB1.1 R1.2 U1.7 | length 734
  Bottom Layer w7: FB1.1@1546.08,993.64 1604.44,1052 1702,1052 1746,1008 1814,1008 1824.31,1018.31 1824.31,1037.69 U1.7 1827.44,1073.44 1851,1097 1989.54,1097 C4.2
  Bottom Layer w30: R1.2 1523.73,989.37 1528,993.64 FB1.1@1546.08,993.64
NetC8_1: C8.1 U1.5 | length 282.2
  Bottom Layer w7: C8.1 1606.18,1238.5 1606.18,1217.82 1776.26,1047.74 U1.5
NetC10_2: C10.2 R1.1 R2.2 U1.3 | length 1204.6
  Bottom Layer w7: C10.2 1852,626.7 1852,860 1801.85,910.15 U1.3
  Bottom Layer w60: R2.2 R1.1 1498.2,389 1646,389 1773.07,516.07 C10.2
NetC11_2: C11.2 FB2.2 U2.9 | length 203.7
  Bottom Layer w7: C11.2 C11.2@2103.12,1757.27 ; C11.2@2109.12,1767.27 2120.43,1778.58 U2.9
  Bottom Layer w15: FB2.2 C11.2
NetC14_2: C14.2 X1.2 | length 78.5
  Bottom Layer w5: X1.2 2357.24,1796.66 C14.2
NetC15_2: C15.2 X1.4 | length 77.9
  Bottom Layer w7: X1.4 2250.99,1717.84 2250.99,1693.9 2277.1,1667.79 C15.2
NetC16_2: C16.2 FB3.2 R3.2 | length 460.7
  Bottom Layer w30: C16.2 933.98,258.46 950.08,242.36 FB3.2
  Bottom Layer w60: C16.2 763.07,367.65 R3.2
NetC18_2: C18.2 R7.2 R9.1 U3.3 | length 841.1
  Top Layer w60: U3.3 634.65,2400.32 C18.2 642.8,2512.8 793.46,2663.46 R9.1 R7.2
NetD1_A: D1.A R7.1 U3.1 | length 992.2
  Top Layer w60: U3.1 834.65,2230.32 D1.A 1178.46,2418.46 1423.46,2663.46 R7.1
NetD1_C: D1.C R8.2 | length 422.2
  Top Layer w60: R8.2 1204.37,2224.37 1398.46,2418.46 D1.C
NRST: C12.1 J1.10 SW1.2 U2.7 | length 1483.4
  Top Layer w15: SW1.2@2050,1620 2160,1620 v1(2161,1621) ; v1(2301.44,1548.44) 2524,1771 2524,1912 2688.74,2076.74 J1.10@2688.74,2205
  Bottom Layer w7: U2.7 2159.8,1823.2 2198.95,1784.05 cw(c2194,1779.1) 2201,1779.1 2201,1649 ; v1@2163.03,1611.03 v1@2163.03,1616.07 ; C12.1@2242.03,1495.53 C12.1 C12.1@2245.97,1495.53 ; v1@2298.88,1548.44 v1(2301.44,1548.44)
  Bottom Layer w15: v1@2161,1613.55 2161,1576.56 C12.1@2242.03,1495.53 ; v1(2161,1621) 2169.73,1621 2197.73,1649 ; C12.1@2245.97,1495.53 v1@2298.88,1548.44
OSC_IN: U2.5 X1.3 | length 246
  Bottom Layer w7: U2.5 2199.17,1865.83 2225,1840 2258,1840 2283.55,1814.45 2283.55,1768.36 2322.57,1729.34 X1.3
OSC_OUT: U2.6 X1.1 | length 137.4
  Bottom Layer w7: U2.6 2179.77,1900.67 2179.77,1844.13 ccw(c2186.77,1844.13) 2181.8,1839.2 2222.32,1798.68 ccw(c2227.24,1803.66) 2227.2,1796.66 X1.1
Speed_IN: J3.2 R9.2 | length 266.5
  Bottom Layer w60: J3.2 155.72,2591.39 284.3,2591.39 356.38,2663.46 R9.2
Speed_OUT: R8.1 R10.2 U2.20 | length 1298.8
  Top Layer w60: R8.1 1074.65,1824.65 1379.65,2129.65 R10.2
  Bottom Layer w7: 1934.99,2092.99 U2.20
  Bottom Layer w30: R10.2 1733.63,2209.37 1850.01,2092.99 1934.99,2092.99
SWD_CLK: J1.7 U2.37 | length 642
  Top Layer w7: J1.7@2680.74,2355 2749,2355 v1(2785,2319)
  Bottom Layer w7: U2.37 2348.09,2171.73 2350.5,2174.14 2350.5,2189.47 2479.49,2318.46 2784.46,2318.46 v1(2785,2319)
SWD_IO: J1.6 U2.34 | length 797
  Top Layer w7: J1.6@2680.74,2405 2680.8,2405.06 v1(2787.12,2405.12) v1(2787.12,2405.12)
  Bottom Layer w7: U2.34 2238.54,2184.56 2242.64,2180.46 2291.48,2180.46 2461.78,2350.75 2742.75,2350.75 2787.12,2395.12 v1(2787.12,2405.12)
USB_D_N: J6.2 U2.32 | length 445.4
  Bottom Layer w7: J6.2 2093.67,2588.3 2093.67,2545.74 2094.57,2544.83 2094.57,2343.39 2141.96,2296 2192,2296 2200.52,2287.48 2200.52,2255.69 2199.45,2254.63 2199.45,2226.26 U2.32
USB_D_P: J6.3 R6.1 U2.33 | length 534.1
  Bottom Layer w7: J6.3 2112.48,2588.3 2112.48,2545.74 2111.57,2544.83 2111.57,2417 ; R6.1 2111.57,2417 ; U2.33 2218.58,2226.26 2218.58,2254.63 2217.52,2255.69 2217.52,2294.53 2199.04,2313 2149,2313 2111.57,2350.43 2111.57,2417
pads on no net: J1. J1.4 J1.8 J1.9 J3.1 J6.1 J6.4 J6.6 J6.9 U2.2 U2.3 U2.4 U2.10 U2.15 U2.16 U2.17 U2.19 U2.21 U2.22 U2.25 U2.26 U2.27 U2.28 U2.29 U2.30 U2.31 U2.38 U2.39 U2.40 U2.41 U2.42 U2.43 U2.45 U2.46 U3.5 U3.6 U3.7

## Polygon pours and split planes (outlines as drawn)
GND on Bottom Layer "GND_L02_P000" (solid, remove dead copper, pour order 0): 0,2874.02 2913.39,2874.02 2913.39,78.74 0,78.74
GND on Top Layer "GND_L01_P001" (solid, remove dead copper, pour order 1): 2913.39,2874.02 2913.39,78.74 0,78.74 0,2874.02

## Silkscreen, mask and mechanical layers (free items; w line width, h text height)
Mechanical 1:
  lines w1: 0,78.74 0,2874.02 2913.39,2874.02 2913.39,78.74 0.5,78.74